# Altium PCB PCB_lora.PcbDoc
Units mm, origin at the board's own origin, x right, y up, seen from the top; angles counter-clockwise.
Board outline 55.25 x 55.25 mm, 2 copper layers (Top Layer, Bottom Layer); 5 components, 29 nets, 48 pads, 0 vias.
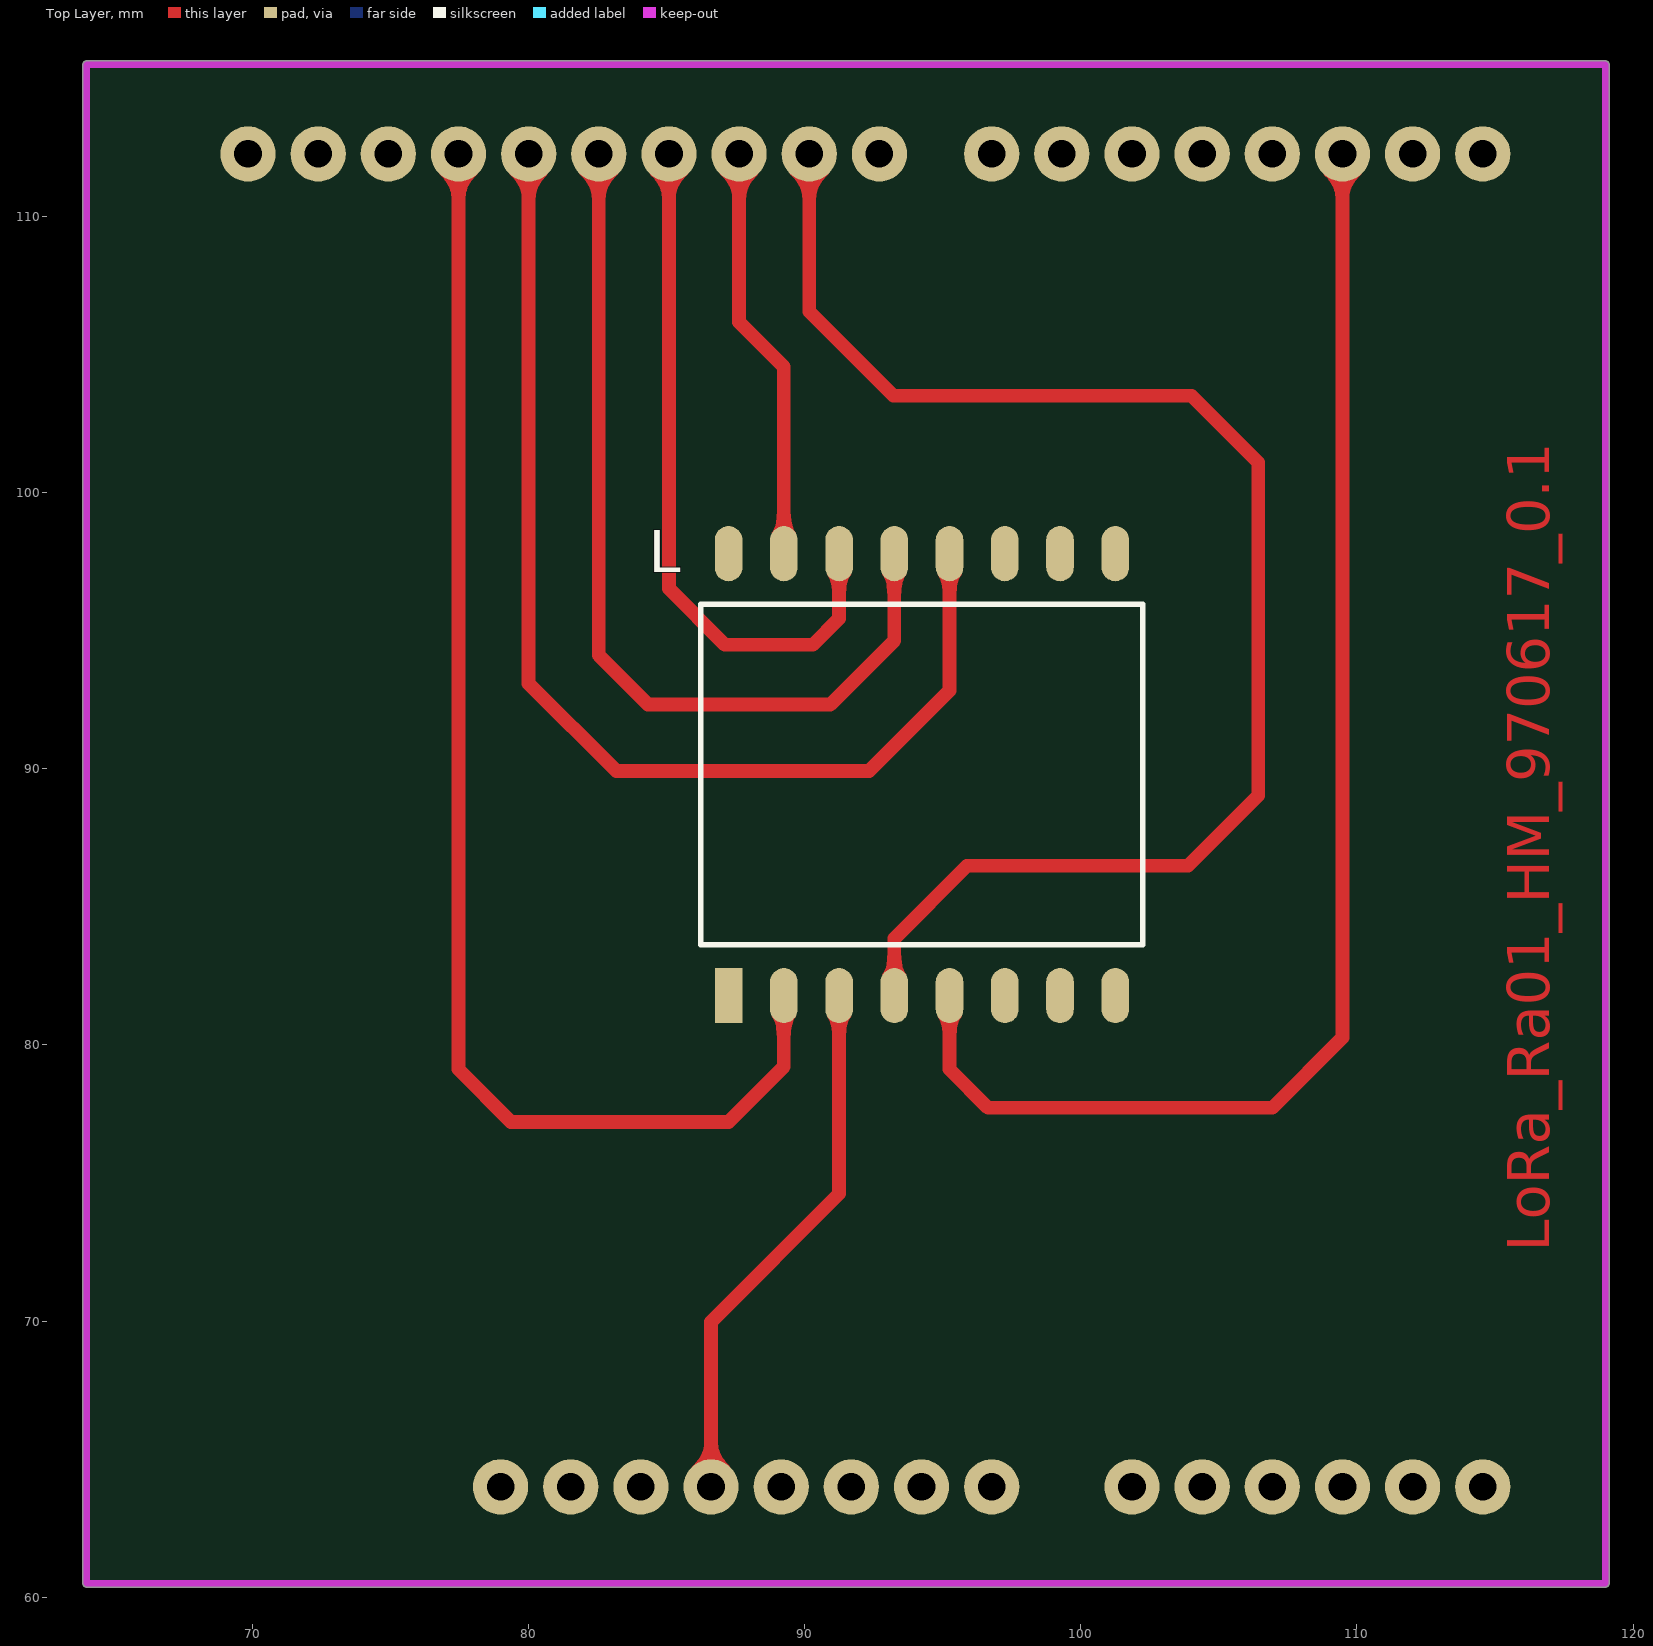
[diagram p0: Top Layer view]
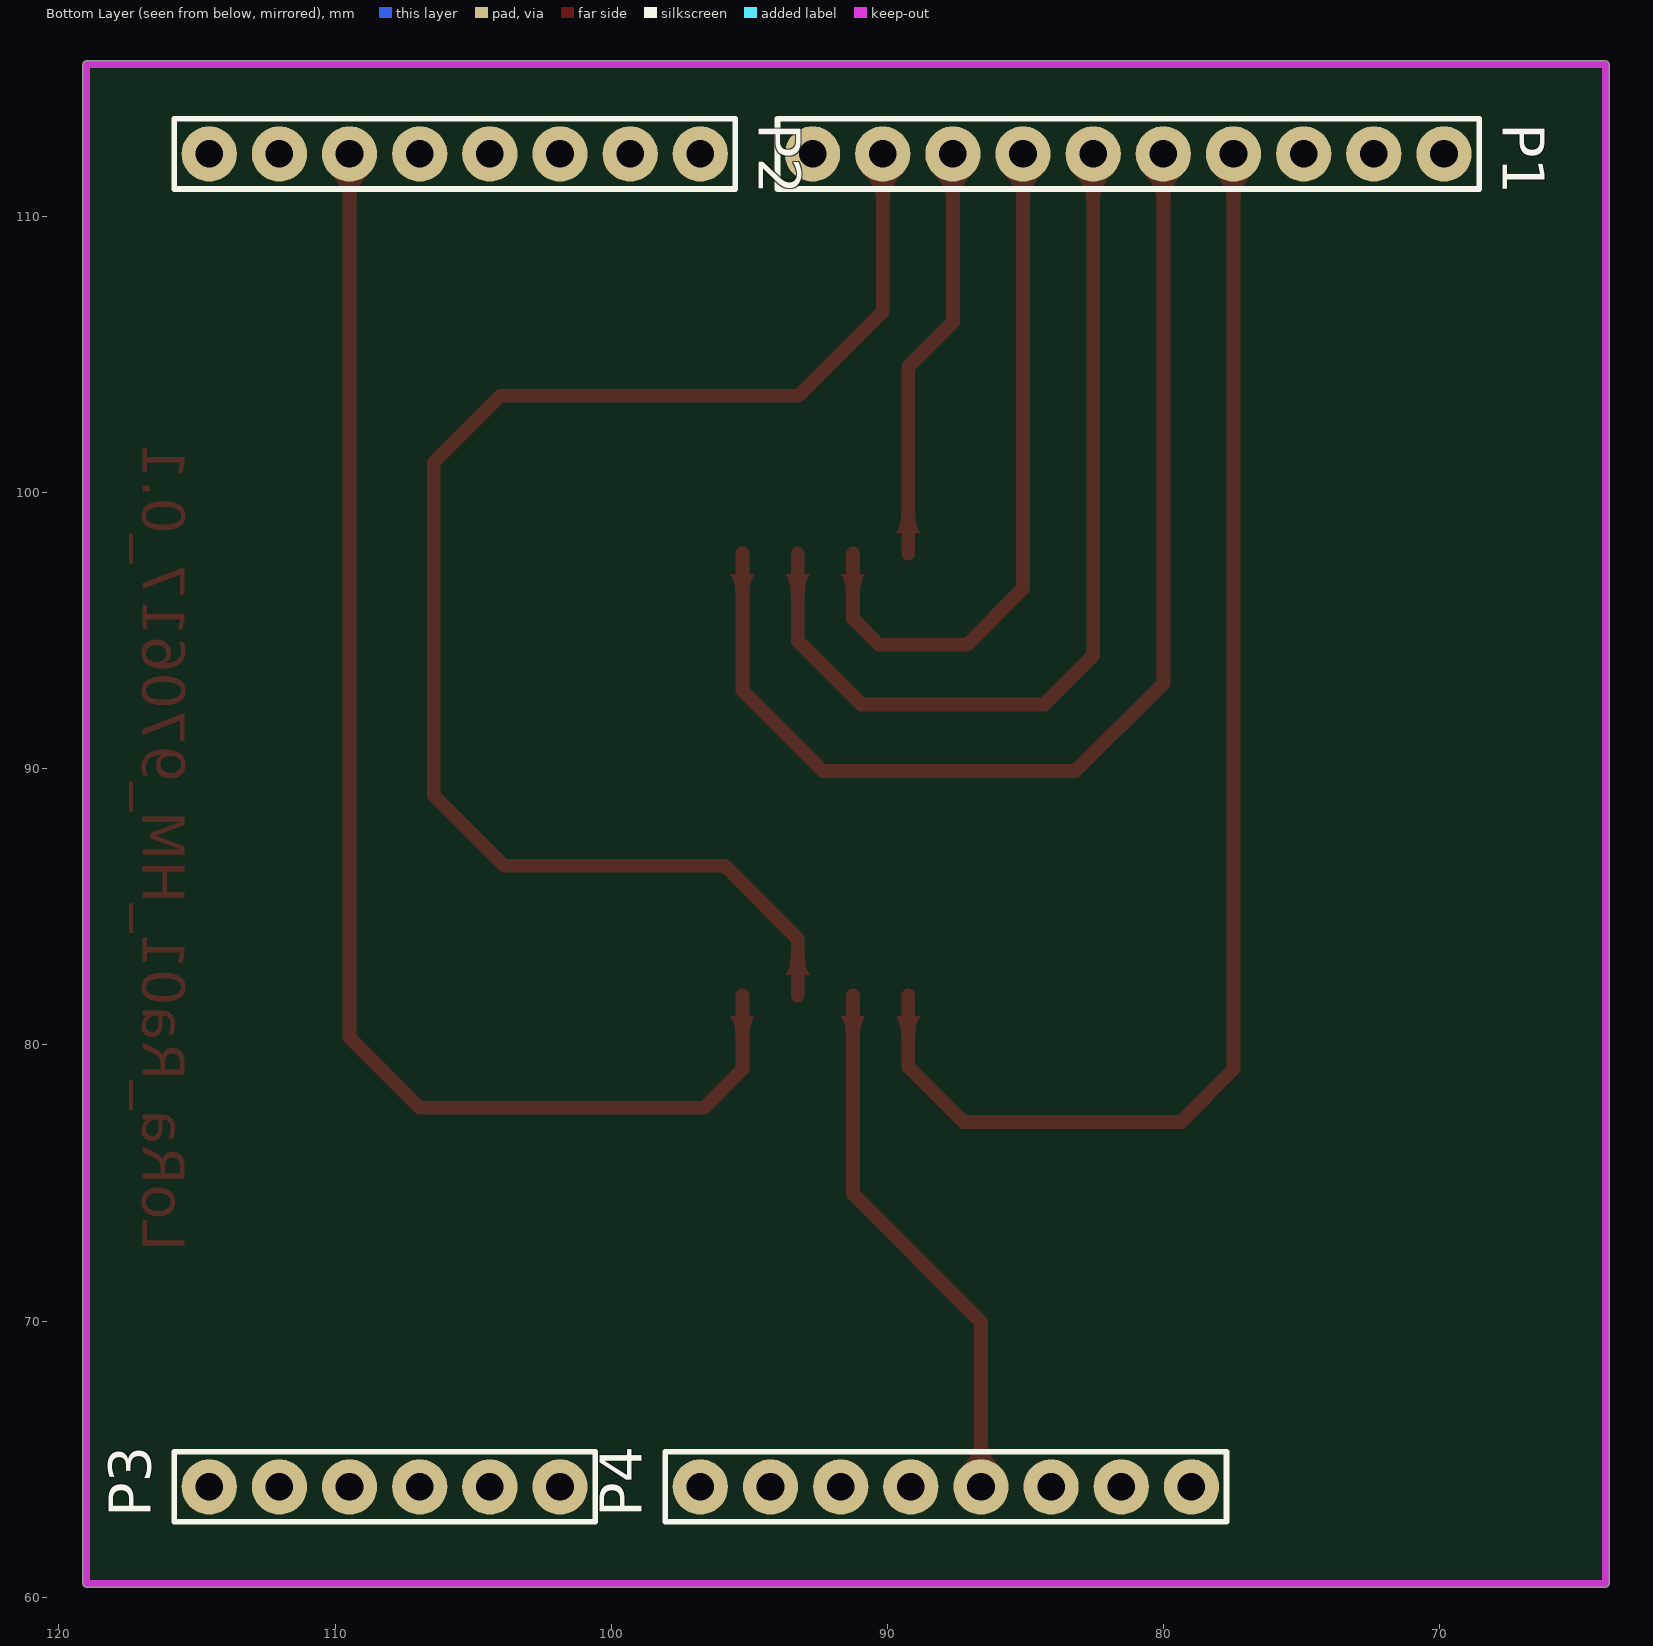
[diagram p1: Bottom Layer view, seen from below]

## Layer stack, top to bottom
Top Solder: solder mask 0.0102, Solder Resist, Dk 3.5
Top Layer: signal copper 0.0356
Dielectric 1: dielectric 0.32, FR-4, Dk 4.8
Bottom Layer: signal copper 0.0356
Bottom Solder: solder mask 0.0102, Solder Resist, Dk 3.5

## Board outline
63.873,60.5 ccw(c64,60.5) 64,60.373 119,60.373 ccw(c119,60.5) 119.127,60.5 119.127,115.5 ccw(c119,115.5) 119,115.627 64,115.627 ccw(c64,115.5) 63.873,115.5

## Design rules (kind name [scope] priority, off if disabled: settings)
Clearance [All] p1: gap=0.254
PolygonConnect [All] p1: connectstyle=Relief reliefconductorwidth=0.254 reliefentries=4 polygonreliefangle="90 Angle" airgapwidth=0.254
RoutingVias [All] p1: holewidth=0.711 width=1.27 viastyle="Through Hole" minholewidth=0.711 minwidth=1.27 maxholewidth=0.711 maxwidth=1.27
SolderMaskExpansion [All] p1: expansion=0.102
Width [All] p1: maxlimit=0.5 minlimit=0.5 preferedwidth=0.5
30 further rules are at their usual default settings.

## Components (designator, comment, footprint, x,y, rotation, side; value= is the part's Value field where it differs from the comment)
L "lr" LoRa 87.249,81.788 r90 top
P1 "Header 10" HDR1X10 92.71,112.26 r180 bottom
P2 "Header 8" HDR1X8 114.554,112.26 r180 bottom
P3 "Header 6" HDR1X6 101.854,64 r0 bottom
P4 "Header 8" HDR1X8 78.994,64 r0 bottom

## Footprints (in the part's own frame and the unit in brackets; to place one, negate y for a bottom-side part, rotate by r counter-clockwise, add the part's x,y. Pads: shape width x height; smd on the part's side, far side on the other; paste and mask are expansions set on the pad)
HDR1X6 [mm] "Connector; Header; 6 Position"
  round 2 hole 1: 1(0,0) 2(2.54,0) 3(5.08,0) 4(7.62,0) 5(10.16,0) 6(12.7,0)
  silkscreen extent -1.27,-1.27 13.97,1.27
HDR1X8 [mm] "Connector; Header; 8 Position"
  round 2 hole 1: 1(0,0) 2(2.54,0) 3(5.08,0) 4(7.62,0) 5(10.16,0) 6(12.7,0) 7(15.24,0) 8(17.78,0)
  silkscreen extent -1.27,-1.27 19.05,1.27
HDR1X10 [mm] "Connector; Header; 10 Position"
  round 2 hole 1: 1(0,0) 2(2.54,0) 3(5.08,0) 4(7.62,0) 5(10.16,0) 6(12.7,0) 7(15.24,0) 8(17.78,0) 9(20.32,0) 10(22.86,0)
  silkscreen extent -1.27,-1.27 24.13,1.27
LoRa [mm]
  rect 2x1 smd: 1(0,0)
  oval 2x1 smd: 2(0,-2) 3(0,-4) 4(0,-6) 5(0,-8) 6(0,-10) 7(0,-12) 8(0,-14) 9(16,0) 10(16,-2) 11(16,-4) 12(16,-6) 13(16,-8) 14(16,-10) 15(16,-12) 16(16,-14)
  silkscreen extent 1.84,-15 14.17,1

## Part data
L: library part LoRa_Ra02
P1: "Header, 10-Pin"
P2 P4: "Header, 8-Pin"
P3: "Header, 6-Pin"

## Nets (pads, with @x,y where several pads share a name; then routed paths per layer and width w, separated by ;. In a path a pad name is that pad's centre, name@x,y a point inside that pad or via, vN(x,y) a via of type N, cw(c..) or ccw(c..) an arc to the next point about the centre after c; other vN are vias at no path point)
+3V3: L.3 P4.4 | length 19.7
  Top Layer w0.5: P4.4 86.614,69.977 91.249,74.612 L.3
+5V: P4.5
AD0: P3.1
AD1: P3.2
AD2: P3.3
AD3: P3.4
AD4: P3.5
AD5: P3.6
AREF: P1.8
GND: L.2 P1.7 | length 49.1
  Top Layer w0.5: P1.7 77.47,79.121 79.375,77.216 87.249,77.216 89.249,79.216 L.2
IO2: L.5 P2.3 | length 50.5
  Top Layer w0.5: L.5 95.249,79.122 96.647,77.724 106.934,77.724 109.474,80.264 P2.3
IO3: P2.4
IO4: P2.5
IO5: P2.6
IO6: P2.7
IO7: P2.8
IO8: P1.1
IO9: L.4 P1.2 | length 53.7
  Top Layer w0.5: P1.2 90.17,106.553 93.218,103.505 104.013,103.505 106.426,101.092 106.426,89.027 103.886,86.487 95.885,86.487 93.249,83.851 L.4
IOREF: P4.2
MISO/IO12: L.12 P1.5 | length 33.7
  Top Layer w0.5: P1.5 82.55,94.107 84.328,92.329 90.932,92.329 93.249,94.646 L.12
MOSI/IO11: L.11 P1.4 | length 25.5
  Top Layer w0.5: P1.4 85.09,96.52 87.122,94.488 90.297,94.488 91.249,95.44 L.11
RESET: P4.3
RX/IO0: P2.1
SCK/IO13: L.13 P1.6 | length 41.9
  Top Layer w0.5: P1.6 80.01,93.091 83.185,89.916 92.329,89.916 95.249,92.836 L.13
SCL: P1.10
SDA: P1.9
SS/IO10: L.10 P1.3 | length 15.1
  Top Layer w0.5: P1.3 87.63,106.172 89.249,104.553 L.10
TX/IO1: P2.2
VIN: P4.8
pads on no net: L.1 L.6 L.7 L.8 L.9 L.14 L.15 L.16 P4.1 P4.6 P4.7

## Keep-outs
Keep-Out Layer:
  lines w0.254: 156.337,16.51 211.337,16.51 ; 64,60.5 119,60.5 119,115.5 64,115.5 64,60.5

## Other copper
Top Layer:
  text "LoRa_Ra01_HM_970617_0.1" at 116.967,72.517 h1.52 r90